# Altium PCB MARLIN.PcbDoc
Units mm, origin at the board's own origin, x right, y up, seen from the top; angles counter-clockwise.
Board outline 109.97 x 66.66 mm, 4 copper layers (Signal Layer 1, Signal Layer 2, Signal Layer 3, Signal Layer 4), stack 2.375 mm thick; 8 components, 9 nets, 56 pads, 188 vias.
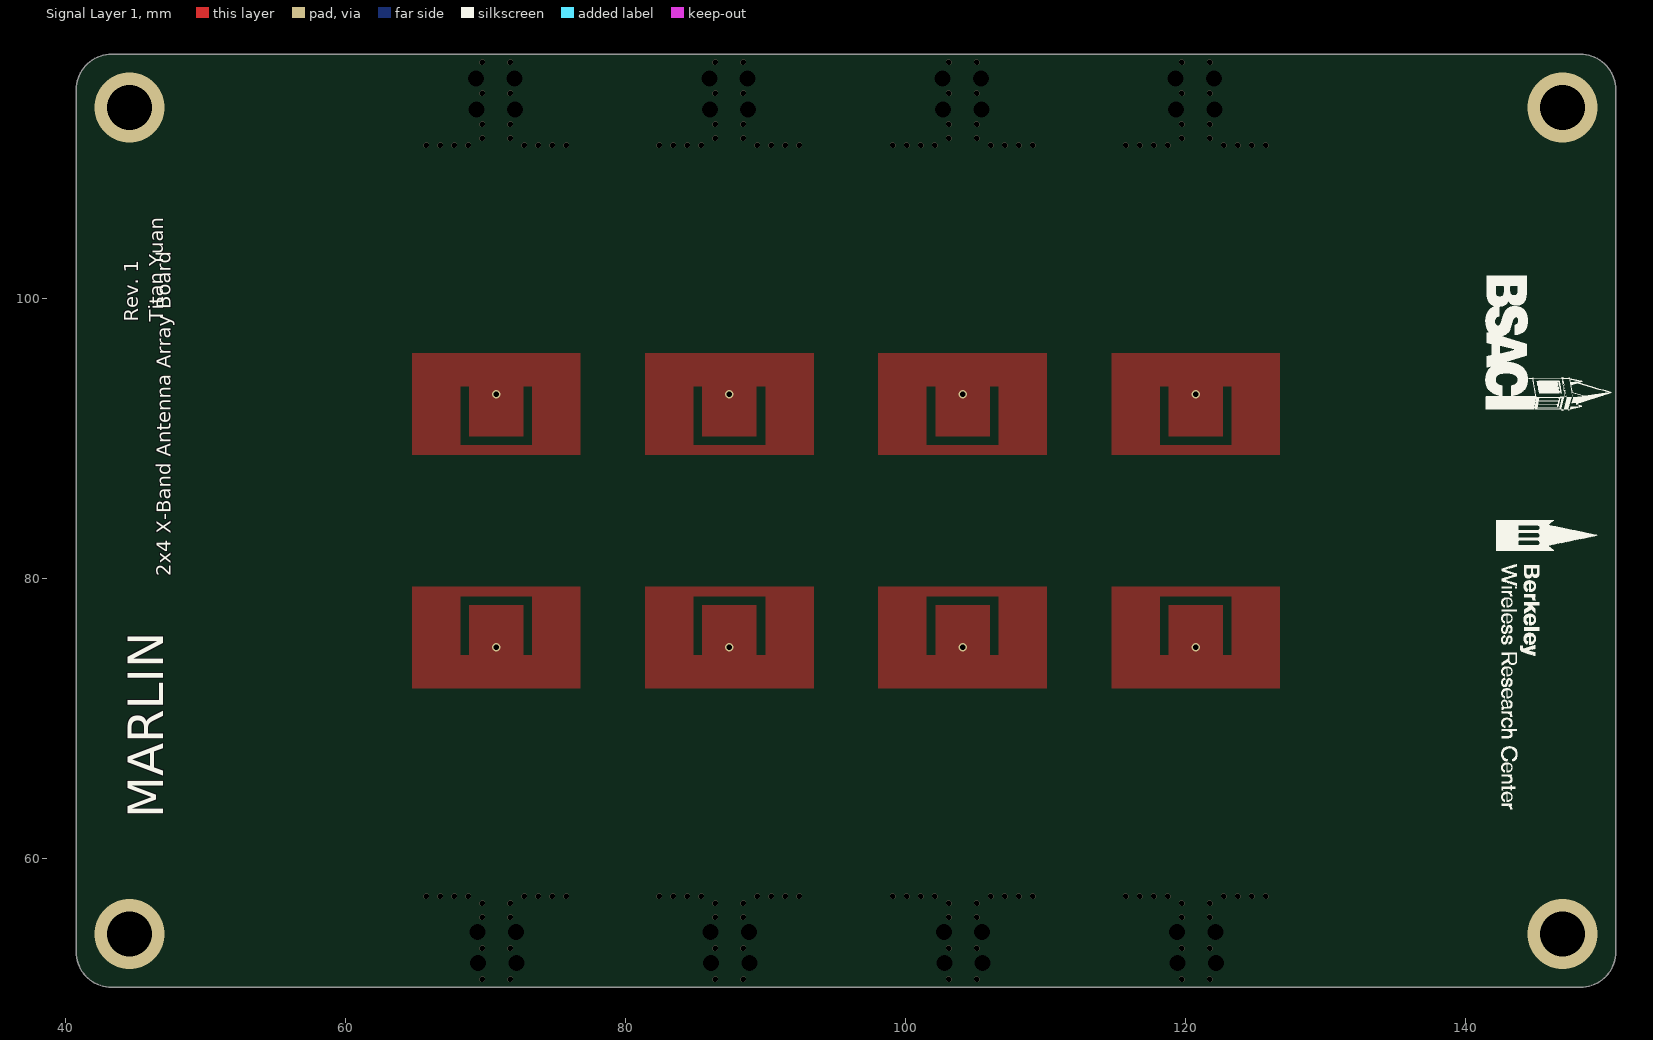
[diagram p0: Signal Layer 1 view]
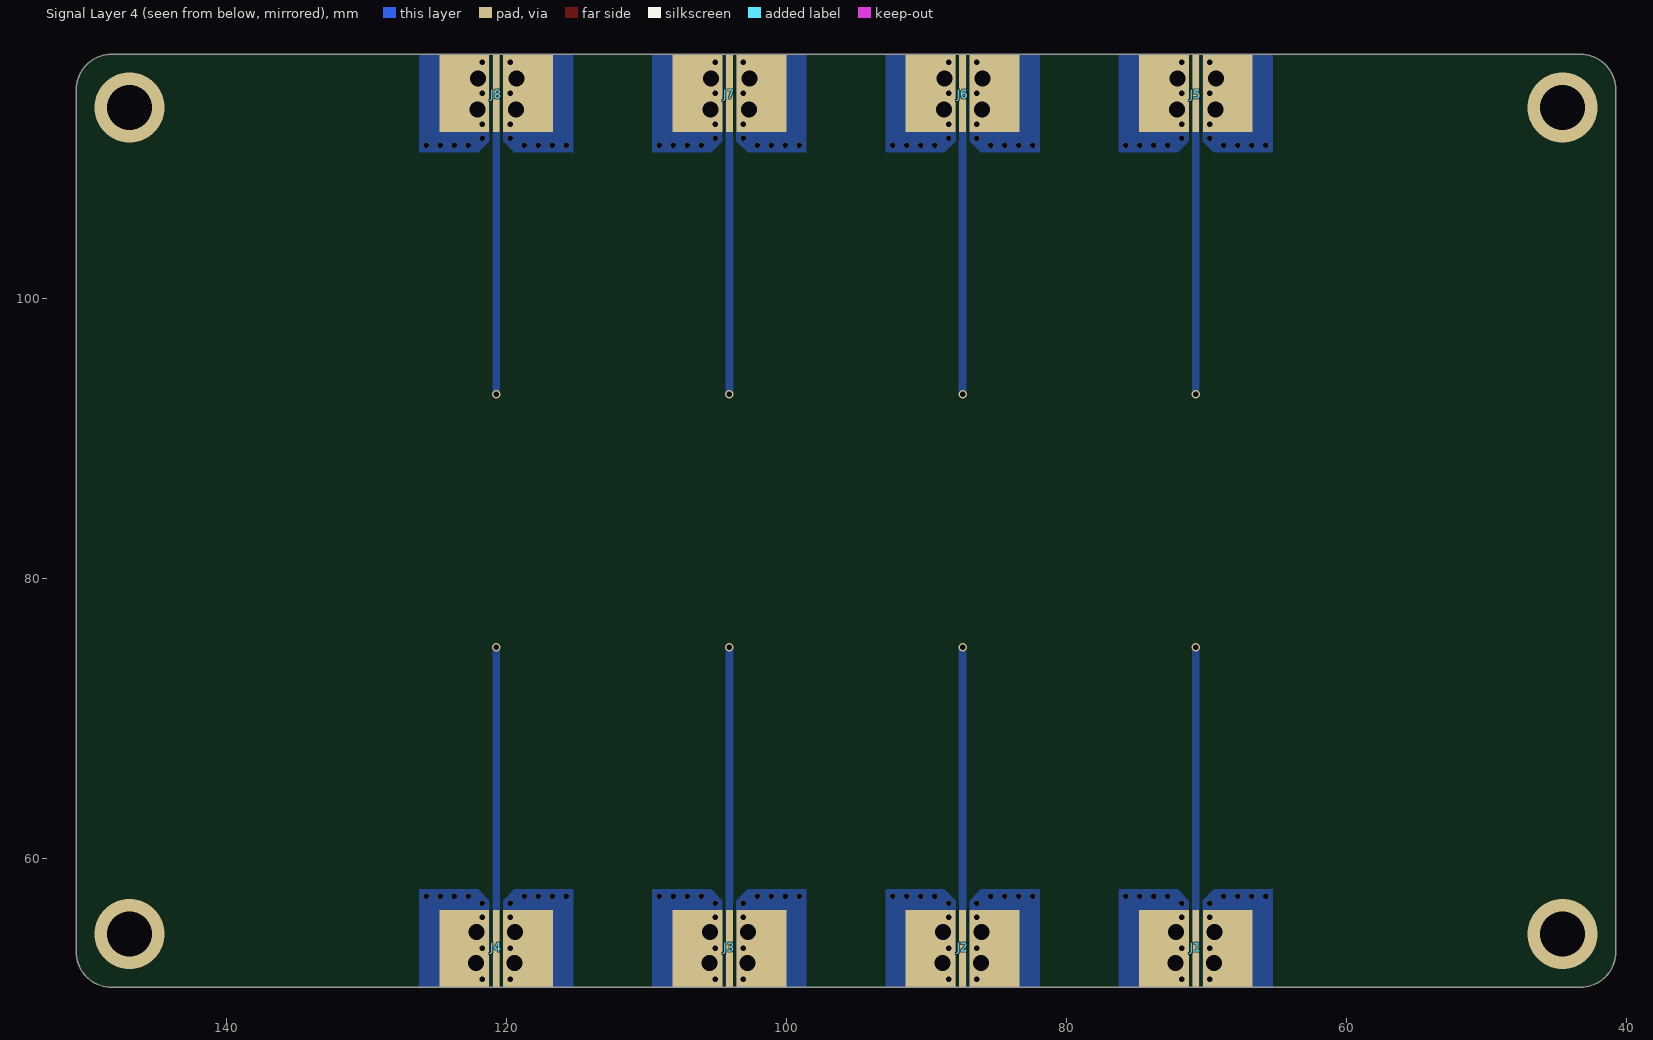
[diagram p1: Signal Layer 4 view, seen from below]
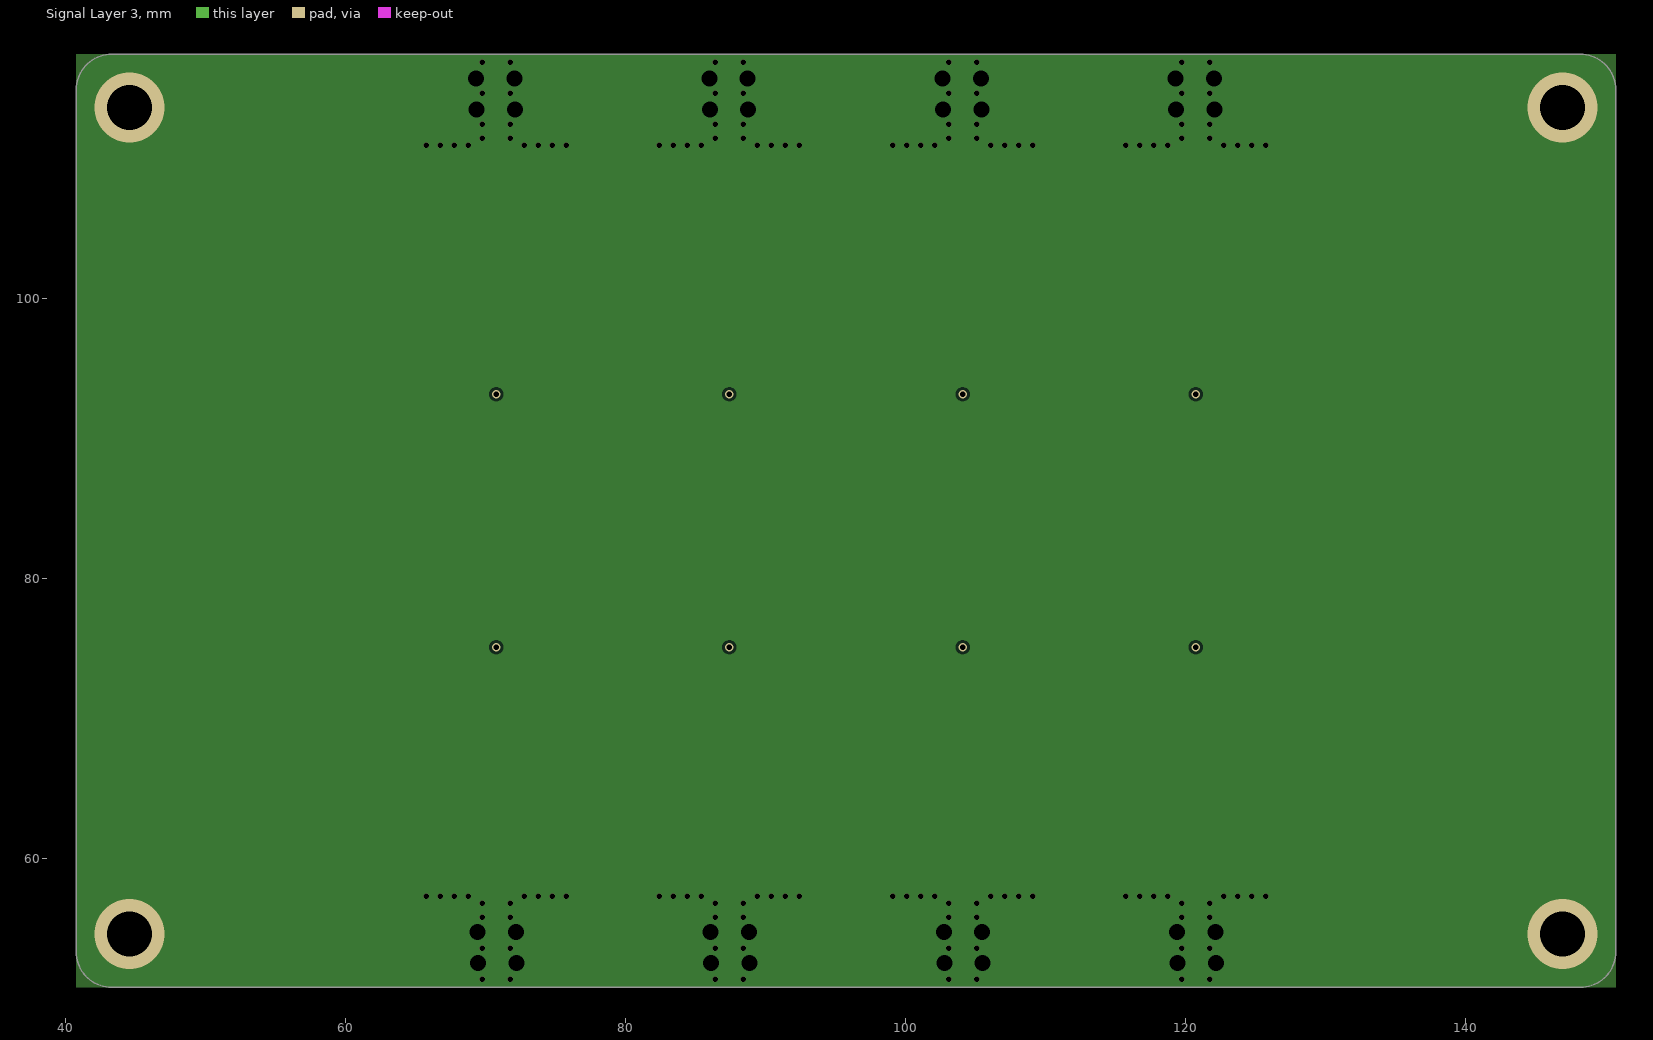
[diagram p2: Signal Layer 3]

## Layer stack, top to bottom
Top Solder: solder mask 0.0127, Solder Resist, Dk 3.5
Signal Layer 1: signal copper 0.035
Core 1: core 1.524, Rogers RO4350B, Dk 3.48
Signal Layer 2: signal copper 0.035
Prepreg 1: prepreg 0.4572, Rogers RO4450F Prepreg, Dk 3.52
Signal Layer 3: signal copper 0.035
Core 2: core 0.254, Rogers RO4350B, Dk 3.48
Signal Layer 4: signal copper 0.035
Bottom Solder: solder mask 0.0127, Solder Resist, Dk 3.5

## Board outline
40.8,53.34 40.8,114.915 cw(c43.34,114.915) 43.34,117.455 148.225,117.455 cw(c148.225,114.915) 150.765,114.915 150.765,53.333 150.765,53.34 cw(c148.225,53.34) 148.225,50.8 43.34,50.8 cw(c43.34,53.34)

## Design rules (kind name [scope] priority, off if disabled: settings)
Clearance [All] p1: gap=0.2 ignorepadtopadclearanceinfootprint=FALSE except(0: Arc-Fill Arc-Poly Arc-Region Track-Fill Track-Poly Track-Region)
PolygonConnect [All] p1: connectstyle=Direct reliefconductorwidth=0.254 reliefentries=4 polygonreliefangle="90 Angle" airgapwidth=0.254
RoutingVias [All] p1: holewidth=0.711 width=1.27 viastyle="Through Hole" minholewidth=0.711 minwidth=1.27 maxholewidth=0.711 maxwidth=1.27
SolderMaskExpansion [All] p1: expansion=0 istentingtop=FALSE
SupplyNets "Schematic Supply Nets" [InNet('GND')] p1: voltage=0.000
Width [All] p1: maxlimit=0.254 minlimit=0.254 preferedwidth=0.254
30 further rules are at their usual default settings.

## Components (designator, comment, footprint, x,y, rotation, side; value= is the part's Value field where it differs from the comment)
J1 "901-10512-1" 901-10512-1 70.8,50.8 r90 bottom
J2 "901-10512-1" 901-10512-1 87.455,50.8 r90 bottom
J3 "901-10512-1" 901-10512-1 104.11,50.8 r90 bottom
J4 "901-10512-1" 901-10512-1 120.765,50.8 r90 bottom
J5 "901-10512-1" 901-10512-1 70.8,117.455 r270 bottom
J6 "901-10512-1" 901-10512-1 87.455,117.455 r270 bottom
J7 "901-10512-1" 901-10512-1 104.11,117.455 r270 bottom
J8 "901-10512-1" 901-10512-1 120.765,117.455 r270 bottom

## Footprints (in the part's own frame and the unit in brackets; to place one, negate y for a bottom-side part, rotate by r counter-clockwise, add the part's x,y. Pads: shape width x height; smd on the part's side, far side on the other; paste and mask are expansions set on the pad)
901-10512-1 [mm] "SMA PCB End Launch Straight Jack 50 Ohm 0.085 Square Flange High Frequency 0.015 Pin"
  rect 5.54x0.49 smd: 1(2.77,0)
  round 0 hole 1.14: 2(1.75,-1.3) 2(1.75,1.435) 2(3.96,-1.335) 2(3.96,1.4)
  rect 5.54x3.564 smd: 2(2.77,-2.283) 2(2.77,2.283)
  body extent -9.53,-3.18 4.55,3.18, height 3.36

## Part data
J1 J2 J3 J4 J5 J6 J7 J8: "SMA PCB End Launch Straight Jack 50 Ohm 0.085 Square Flange High Frequency 0.015 Pin", Manufacturer=Amphenol, Maximum Frequency="26.5 GHz", Manufacturer Part Number=901-10512-1

## Via types
v1: diameter 0.4, hole 0.4, Signal Layer 1 to Signal Layer 4, tented both sides, 128 vias
v2: diameter 0.4, hole 0.4, Signal Layer 1 to Signal Layer 4, 48 vias
v3: diameter 0.6, hole 0.4, Signal Layer 1 to Signal Layer 4, tented both sides, 8 vias
v4: diameter 5, hole 3.2, Signal Layer 1 to Signal Layer 4, 4 vias

## Nets (pads, with @x,y where several pads share a name; then routed paths per layer and width w, separated by ;. In a path a pad name is that pad's centre, name@x,y a point inside that pad or via, vN(x,y) a via of type N, cw(c..) or ccw(c..) an arc to the next point about the centre after c; other vN are vias at no path point)
ANTENNA_1: J1.1
  other v3: 70.8,75.09
ANTENNA_2: J2.1
  other v3: 87.455,75.09
ANTENNA_3: J3.1
  other v3: 104.11,75.09
ANTENNA_4: J4.1
  other v3: 120.765,75.09
ANTENNA_5: J5.1
  other v3: 70.8,93.165
ANTENNA_6: J6.1
  other v3: 87.455,93.165
ANTENNA_7: J7.1
  other v3: 104.11,93.165
ANTENNA_8: J8.1
  other v3: 120.765,93.165
GND: J1.2 J2.2 J3.2 J4.2 J5.2 J6.2 J7.2 J8.2
  other v1: 69.799,51.38 71.801,51.38 86.454,51.38 88.456,51.38 103.109,51.38 105.111,51.38 119.764,51.38 121.766,51.38 69.799,53.59 71.801,53.59 86.454,53.59 88.456,53.59 103.109,53.59 105.111,53.59 119.764,53.59 121.766,53.59 69.799,55.8 71.801,55.8 86.454,55.8 88.456,55.8 103.109,55.8 105.111,55.8 119.764,55.8 121.766,55.8 69.799,56.8 71.801,56.8 86.454,56.8 88.456,56.8 103.109,56.8 105.111,56.8 119.764,56.8 121.766,56.8 65.799,57.3 66.799,57.3 67.799,57.3 68.799,57.3 72.801,57.3 73.801,57.3 74.801,57.3 75.801,57.3 82.454,57.3 83.454,57.3 84.454,57.3 85.454,57.3 89.456,57.3 90.456,57.3 91.456,57.3 92.456,57.3 99.109,57.3 100.109,57.3 101.109,57.3 102.109,57.3 106.111,57.3 107.111,57.3 108.111,57.3 109.111,57.3 115.764,57.3 116.764,57.3 117.764,57.3 118.764,57.3 122.766,57.3 123.766,57.3 124.766,57.3 125.766,57.3 65.799,110.955 66.799,110.955 67.799,110.955 68.799,110.955 72.801,110.955 73.801,110.955 74.801,110.955 75.801,110.955 82.454,110.955 83.454,110.955 84.454,110.955 85.454,110.955 89.456,110.955 90.456,110.955 91.456,110.955 92.456,110.955 99.109,110.955 100.109,110.955 101.109,110.955 102.109,110.955 106.111,110.955 107.111,110.955 108.111,110.955 109.111,110.955 115.764,110.955 116.764,110.955 117.764,110.955 118.764,110.955 122.766,110.955 123.766,110.955 124.766,110.955 125.766,110.955 69.799,111.455 71.801,111.455 86.454,111.455 88.456,111.455 103.109,111.455 105.111,111.455 119.764,111.455 121.766,111.455 69.799,112.455 71.801,112.455 86.454,112.455 88.456,112.455 103.109,112.455 105.111,112.455 119.764,112.455 121.766,112.455 69.799,114.665 71.801,114.665 86.454,114.665 88.456,114.665 103.109,114.665 105.111,114.665 119.764,114.665 121.766,114.665 69.799,116.875 71.801,116.875 86.454,116.875 88.456,116.875 103.109,116.875 105.111,116.875 119.764,116.875 121.766,116.875
  other v2: 69.799,51.38 71.801,51.38 86.454,51.38 88.456,51.38 103.109,51.38 105.111,51.38 119.764,51.38 121.766,51.38 69.799,53.59 71.801,53.59 86.454,53.59 88.456,53.59 103.109,53.59 105.111,53.59 119.764,53.59 121.766,53.59 69.799,55.8 71.801,55.8 86.454,55.8 88.456,55.8 103.109,55.8 105.111,55.8 119.764,55.8 121.766,55.8 69.799,112.455 71.801,112.455 86.454,112.455 88.456,112.455 103.109,112.455 105.111,112.455 119.764,112.455 121.766,112.455 69.799,114.665 71.801,114.665 86.454,114.665 88.456,114.665 103.109,114.665 105.111,114.665 119.764,114.665 121.766,114.665 69.799,116.875 71.801,116.875 86.454,116.875 88.456,116.875 103.109,116.875 105.111,116.875 119.764,116.875 121.766,116.875
  other v4: 44.61,54.61 146.955,54.61 44.61,113.645 146.955,113.645

## Polygon pours and split planes (outlines as drawn)
GND on Signal Layer 4 "GND_L04_P085" (solid, pour order 85): 120.264,113.495 120.264,111.255 119.464,110.455 115.264,110.455 115.264,117.455 120.264,117.455
GND on Signal Layer 4 "GND_L04_P084" (solid, pour order 84): 126.266,117.455 126.266,110.455 122.066,110.455 121.266,111.255 121.266,117.455
GND on Signal Layer 4 "GND_L04_P081" (solid, pour order 81): 103.609,113.495 103.609,111.255 102.809,110.455 98.609,110.455 98.609,117.455 103.609,117.455
GND on Signal Layer 4 "GND_L04_P080" (solid, pour order 80): 109.611,117.455 109.611,110.455 105.411,110.455 104.611,111.255 104.611,117.455
GND on Signal Layer 4 "GND_L04_P077" (solid, pour order 77): 86.954,113.495 86.954,111.255 86.154,110.455 81.954,110.455 81.954,117.455 86.954,117.455
GND on Signal Layer 4 "GND_L04_P076" (solid, pour order 76): 92.956,117.455 92.956,110.455 88.756,110.455 87.956,111.255 87.956,117.455
GND on Signal Layer 4 "GND_L04_P073" (solid, pour order 73): 70.299,113.495 70.299,111.255 69.499,110.455 65.299,110.455 65.299,117.455 70.299,117.455
GND on Signal Layer 4 "GND_L04_P072" (solid, pour order 72): 76.301,117.455 76.301,110.455 72.101,110.455 71.301,111.255 71.301,117.455
GND on Signal Layer 4 "GND_L04_P069" (solid, pour order 69): 121.266,54.76 121.266,57 122.066,57.8 126.266,57.8 126.266,50.8 121.266,50.8
GND on Signal Layer 4 "GND_L04_P068" (solid, pour order 68): 115.264,50.8 115.264,57.8 119.464,57.8 120.264,57 120.264,50.8
GND on Signal Layer 4 "GND_L04_P065" (solid, pour order 65): 104.611,54.76 104.611,57 105.411,57.8 109.611,57.8 109.611,50.8 104.611,50.8
GND on Signal Layer 4 "GND_L04_P064" (solid, pour order 64): 98.609,50.8 98.609,57.8 102.809,57.8 103.609,57 103.609,50.8
GND on Signal Layer 4 "GND_L04_P061" (solid, pour order 61): 87.956,54.76 87.956,57 88.756,57.8 92.956,57.8 92.956,50.8 87.956,50.8
GND on Signal Layer 4 "GND_L04_P060" (solid, pour order 60): 81.954,50.8 81.954,57.8 86.154,57.8 86.954,57 86.954,50.8
GND on Signal Layer 4 "GND_L04_P050" (solid, pour order 50): 71.301,54.76 71.301,57 72.101,57.8 76.301,57.8 76.301,50.8 71.301,50.8
GND on Signal Layer 4 "GND_L04_P049" (solid, pour order 49): 65.299,50.8 65.299,57.8 69.499,57.8 70.299,57 70.299,50.8
ANTENNA_8 on Signal Layer 4 "ANTENNA_8_L04_P086" (solid, pour order 86): 121.01,111.255 121.029,111.236 121.029,93.165 120.501,93.165 120.501,111.236 120.52,111.255 120.52,117.455 121.01,117.455
ANTENNA_7 on Signal Layer 4 "ANTENNA_7_L04_P082" (solid, pour order 82): 104.355,111.255 104.374,111.236 104.374,93.165 103.846,93.165 103.846,111.236 103.865,111.255 103.865,117.455 104.355,117.455
ANTENNA_6 on Signal Layer 4 "ANTENNA_6_L04_P078" (solid, pour order 78): 87.7,111.255 87.719,111.236 87.719,93.165 87.191,93.165 87.191,111.236 87.21,111.255 87.21,117.455 87.7,117.455
ANTENNA_5 on Signal Layer 4 "ANTENNA_5_L04_P074" (solid, pour order 74): 71.045,111.255 71.064,111.236 71.064,93.165 70.536,93.165 70.536,111.236 70.555,111.255 70.555,117.455 71.045,117.455
ANTENNA_4 on Signal Layer 4 "ANTENNA_4_L04_P070" (solid, pour order 70): 120.52,57 120.501,57.019 120.501,75.09 121.029,75.09 121.029,57.019 121.01,57 121.01,50.8 120.52,50.8
ANTENNA_3 on Signal Layer 4 "ANTENNA_3_L04_P066" (solid, pour order 66): 103.865,57 103.846,57.019 103.846,75.09 104.374,75.09 104.374,57.019 104.355,57 104.355,50.8 103.865,50.8
ANTENNA_2 on Signal Layer 4 "ANTENNA_2_L04_P062" (solid, pour order 62): 87.21,57 87.191,57.019 87.191,75.09 87.719,75.09 87.719,57.019 87.7,57 87.7,50.8 87.21,50.8
ANTENNA_1 on Signal Layer 4 "ANTENNA_1_L04_P051" (solid, pour order 51): 70.555,57 70.536,57.019 70.536,75.09 71.064,75.09 71.064,57.019 71.045,57 71.045,50.8 70.555,50.8
no net on Bottom Solder "NONET_L03_P001" (solid, pour order 1): 50.8,117.455 140.765,117.455 140.765,50.8 50.8,50.8
no net on Top Solder "NONET_L03_P000" (solid, pour order 0): 50.8,117.455 140.765,117.455 140.765,50.8 50.8,50.8
ANTENNA_8 on Signal Layer 1 "Signal Layer 1-ANTENNA_8" (solid, pour order 83): 126.776,96.081 114.755,96.081 114.755,88.83 126.776,88.83
ANTENNA_7 on Signal Layer 1 "Signal Layer 1-ANTENNA_7" (solid, pour order 79): 110.121,96.081 98.1,96.081 98.1,88.83 110.121,88.83
ANTENNA_6 on Signal Layer 1 "Signal Layer 1-ANTENNA_6" (solid, pour order 75): 93.466,96.081 81.445,96.081 81.445,88.83 93.466,88.83
ANTENNA_5 on Signal Layer 1 "Signal Layer 1-ANTENNA_5" (solid, pour order 71): 76.811,96.081 64.79,96.081 64.79,88.83 76.811,88.83
ANTENNA_4 on Signal Layer 1 "Signal Layer 1-ANTENNA_4" (solid, pour order 67): 114.754,72.174 126.775,72.174 126.775,79.425 114.754,79.425
ANTENNA_3 on Signal Layer 1 "Signal Layer 1-ANTENNA_3" (solid, pour order 63): 98.099,72.174 110.12,72.174 110.12,79.425 98.099,79.425
ANTENNA_2 on Signal Layer 1 "Signal Layer 1-ANTENNA_2" (solid, pour order 59): 81.444,72.174 93.465,72.174 93.465,79.425 81.444,79.425
ANTENNA_1 on Signal Layer 1 "Signal Layer 1-ANTENNA_1" (solid, pour order 44): 64.79,72.175 76.81,72.175 76.81,79.425 64.79,79.425
GND on Signal Layer 3 "GND_L03_P002" (solid, pour order 2): 40.8,117.455 150.765,117.455 150.765,50.8 40.8,50.8

## Other copper
Signal Layer 1:
  pour cut-out: 123.312,93.692 122.728,93.692 122.728,90.137 118.802,90.137 118.802,93.692 118.219,93.692 118.219,89.554 123.312,89.554
  pour cut-out: 106.657,93.692 106.073,93.692 106.073,90.137 102.147,90.137 102.147,93.692 101.564,93.692 101.564,89.554 106.657,89.554
  pour cut-out: 90.002,93.692 89.418,93.692 89.418,90.137 85.492,90.137 85.492,93.692 84.909,93.692 84.909,89.554 90.002,89.554
  pour cut-out: 73.347,93.692 72.763,93.692 72.763,90.137 68.837,90.137 68.837,93.692 68.254,93.692 68.254,89.554 73.347,89.554
  pour cut-out: 118.218,74.563 118.802,74.563 118.802,78.118 122.728,78.118 122.728,74.563 123.311,74.563 123.311,78.701 118.218,78.701
  pour cut-out: 101.563,74.563 102.147,74.563 102.147,78.118 106.073,78.118 106.073,74.563 106.656,74.563 106.656,78.701 101.563,78.701
  pour cut-out: 84.908,74.563 85.492,74.563 85.492,78.118 89.418,78.118 89.418,74.563 90.001,74.563 90.001,78.701 84.908,78.701
  pour cut-out: 68.253,74.563 68.837,74.563 68.837,78.118 72.763,78.118 72.763,74.563 73.346,74.563 73.346,78.701 68.253,78.701

## Silkscreen, mask and mechanical layers (free items; w line width, h text height)
Top Overlay:
  drawing of 41 lines, arcs and shapes, not listed
  text "Rev. 1" at 45.219,98.357 h1.02 r90
  text "Titan Yuan" at 47.001,98.357 h1.02 r90
  text "2x4 X-Band Antenna Array Board" at 47.537,80.164 h1.02 r90
  text "MARLIN" at 47.029,62.892 h2.54 r90
Mechanical 1:
  lines w0.254: 150.765,53.333 150.765,114.915 ccw(c148.225,114.915) 148.225,117.455 43.34,117.455 ccw(c43.34,114.915) 40.8,114.915 40.8,53.34 ccw(c43.34,53.34) 43.34,50.8 148.225,50.8 ccw(c148.225,53.34) 150.765,53.34